# Allegro board my__AVRUSB500.brd
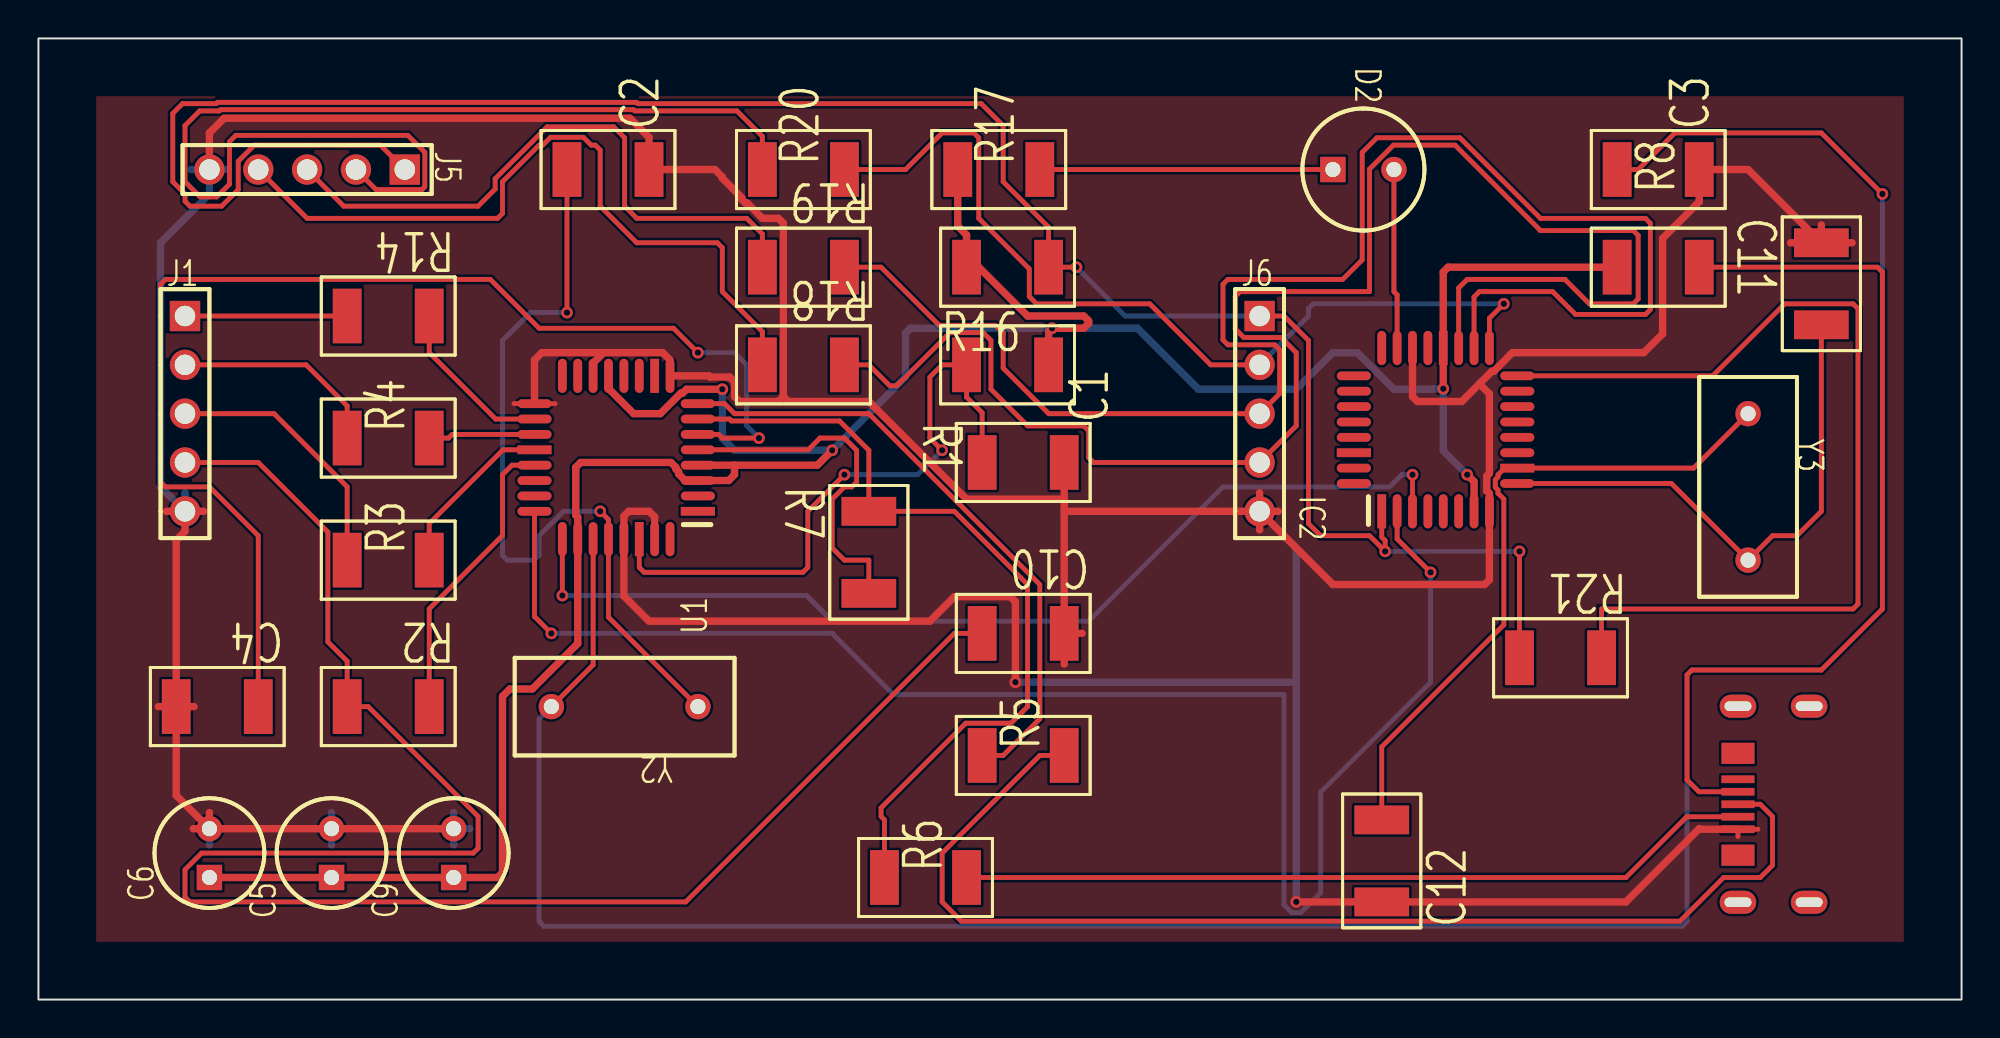
[diagram p0: board, top side]
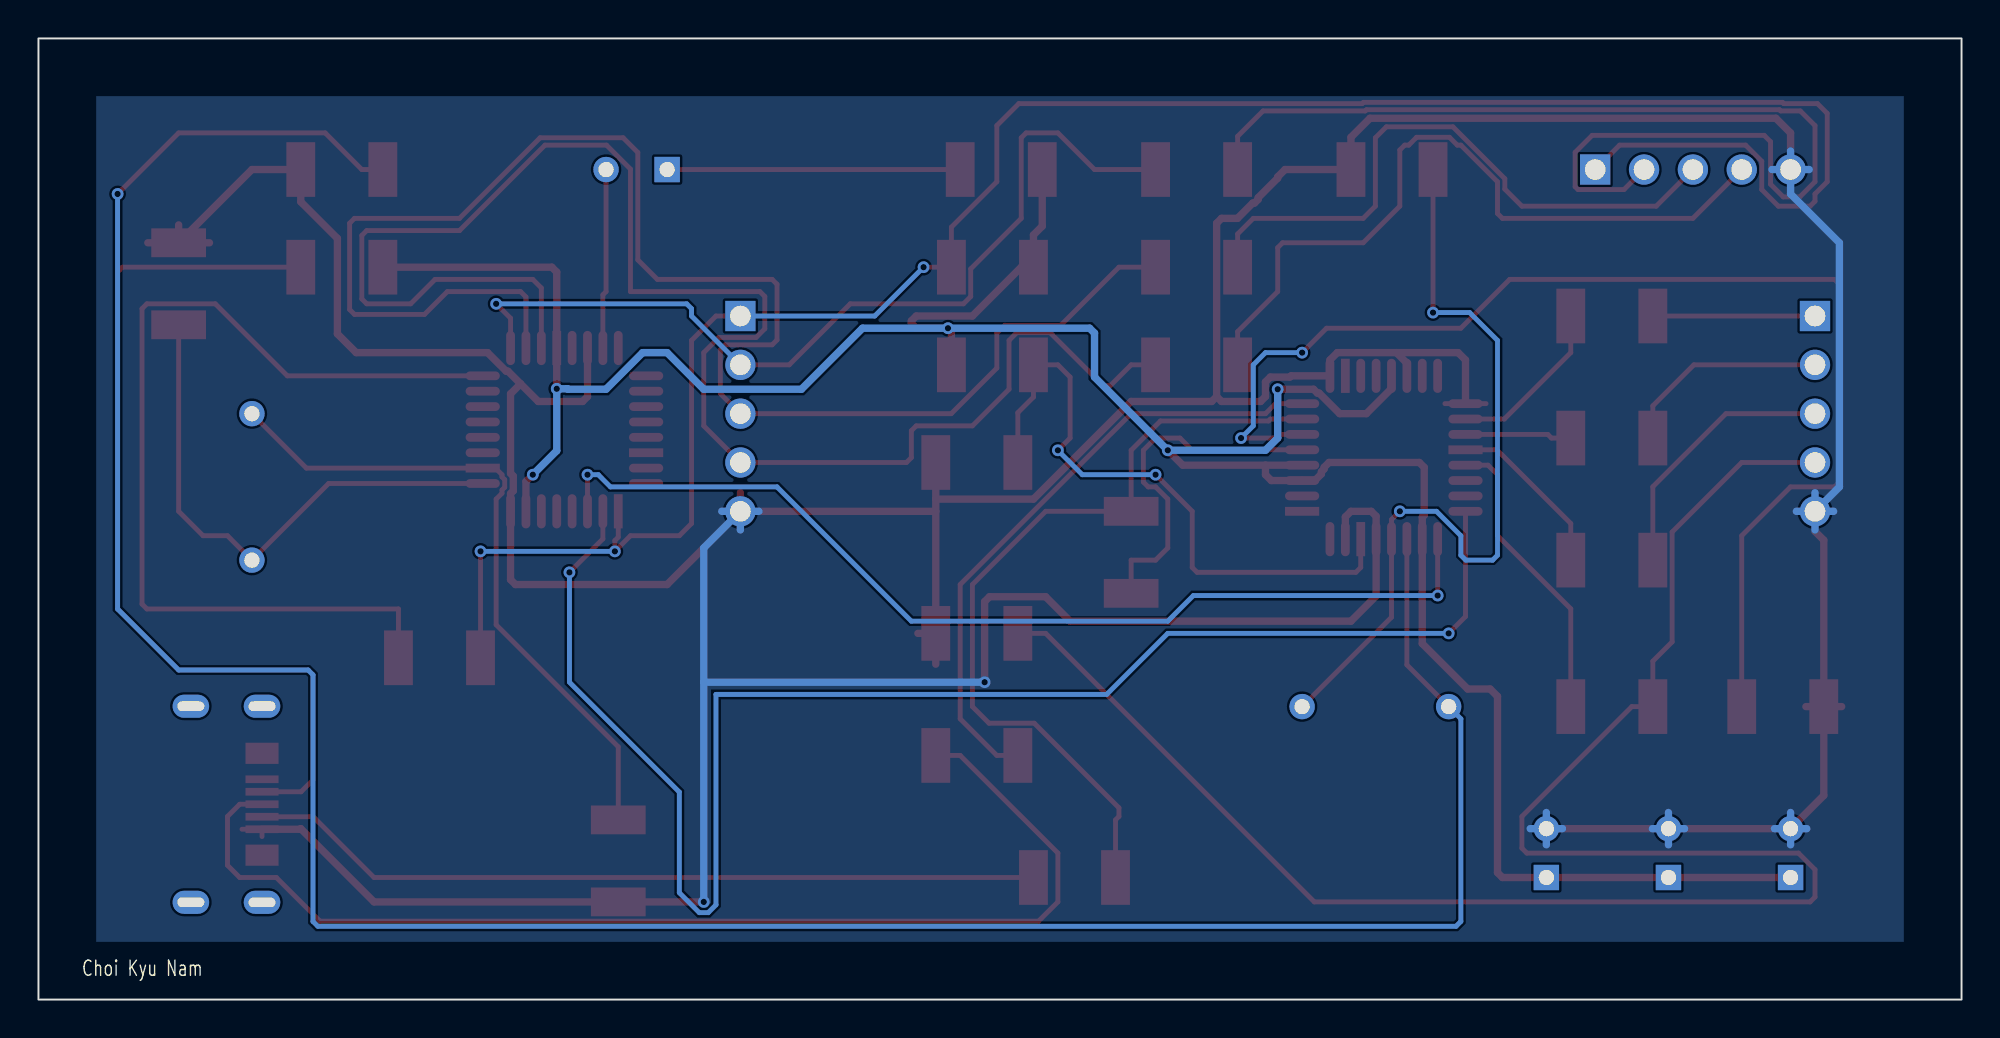
[diagram p1: board, bottom side, seen from below]

Outline 100 x 50 mm; copper layers: TOP, BOTTOM. Coordinates in mm from the lower left corner of the outline.
Outline path: rectangle 0,0 100,50

## Design rules (mm)
constraint set DEFAULT: min track width 0.254, pair gap 0.254
net group POWERNET: nets VCC

## Placement (name value [footprint] x y rotation side)
C1  47nF  [CPCYL1D225LS100031]  53.34 27.94 180 top
C2  27pF  [CPCYL1D225LS100031]  31.75 43.18 180 top
C3  27pF  [CPCYL1D225LS100031]  86.36 43.18 180 top
C4  47nF  [CPCYL1D225LS100031]  11.43 15.24 180 top
C5  100nF  [CPCYL1D225LS100031#2]  15.24 6.35 90 top
C6  1uF  [CPCYL1D225LS100031#2]  8.89 6.35 90 top
C9  100nF  [CPCYL1D225LS100031#2]  21.59 6.35 90 top
C10  22nF  [CPCYL1D225LS100031]  53.34 19.05 180 top
C11  100nF  [CPCYL1D225LS100031]  92.71 39.37 270 top
C12  100nF  [CPCYL1D225LS100031]  69.85 5.08 90 top
D2  LED  [CYLD250LS125031]  67.31 43.18 0 top
IC2  ATmega8  [QUAD80M32WG900]  69.85 25.4 0 top
J1  bbpg_Bitbang  [BLKCON100VHTM1SQSW1005]  7.62 35.56 270 top
J2  USBA  [MICRO_USB]  92.07 10.16 90 top
J5  avrusb500_out  [BLKCON100VHTM1SQSW1005]  19.05 43.18 180 top
J6  firmware_in  [BLKCON100VHTM1SQSW1005]  63.5 35.56 270 top
NOREF  -  []  100 0 90 top
NOREF#2  -  []  0 50 0 top
R1  470  [AX400X100031]  48.26 33.02 0 top
R2  220  [AX400X100031]  20.32 15.24 180 top
R3  220  [AX400X100031]  20.32 22.86 180 top
R4  220  [AX400X100031]  20.32 29.21 180 top
R5  27  [AX400X100031]  53.34 12.7 180 top
R6  27  [AX400X100031]  48.26 6.35 180 top
R7  1.5k  [AX400X100031]  43.18 25.4 270 top
R8  2.2  [AX400X100031]  86.36 38.1 180 top
R14  220  [AX400X100031]  20.32 35.56 180 top
R16  10k  [AX400X100031]  48.26 38.1 0 top
R17  470  [AX400X100031]  52.07 43.18 180 top
R18  1k  [AX400X100031]  41.91 33.02 180 top
R19  220  [AX400X100031]  41.91 38.1 180 top
R20  1k  [AX400X100031]  41.91 43.18 180 top
R21  220  [AX400X100031]  81.28 17.78 180 top
U1  FT232BM  [QUAD80M32WG900]  34.29 25.4 90 top
Y2  6Mhz  [RAD450X200LS300031]  34.29 15.24 180 top
Y3  3.6864Mhz  [RAD450X200LS300031]  88.9 30.48 270 top

## Library data of the parts
C1-C4 C10-C12 = CAPACITOR NON-POL: alternate symbols: (SML2015)
C5 C9 = CAPACITOR NON-POL: alternate symbols: (SMDCAP)
C6 = CAPACITOR POL: alternate symbols: (SMDCAP)
D2 = LED
IC2 = ATmega8-DIL28_1
J1 J5 J6 = CON5
J2 = CON4_7
R1-R8 R14 R16-R21 = R: alternate symbols: (SML2015)
U1 = FT232BM_2
Y2 Y3 = ZTA

## Footprints (pads in the part's own frame, mm; a bottom-side part is the same pattern mirrored in y, then rotated)
AX400X100031
  rect 1.499x2.845 smd: 1(0,0) 2(4.267,0)
BLKCON100VHTM1SQSW1005
  rect 1.575x1.575 hole 1.067: 1(0,0)
  round 1.575 hole 1.067: 2(2.54,0) 3(5.08,0) 4(7.62,0) 5(10.16,0)
CPCYL1D225LS100031
  rect 1.499x2.845 smd: 1(0,0) 2(4.267,0)
CPCYL1D225LS100031#2
  rect 1.321x1.321 hole 0.787: 1(0,0)
  round 1.321 hole 0.787: 2(2.54,0)
CYLD250LS125031
  rect 1.321x1.321 hole 0.787: 1(0,0)
  round 1.321 hole 0.787: 2(3.175,0)
MICRO_USB
  oval 1.2x1.9 hole 0.5x1.4: (-5.1,3.7) (-5.1,0) (5.1,3.7) (5.1,0)
  rect 1.1x1.72 smd: (-2.65,3.7) (2.65,3.7)
  rect 0.4x1.72 smd: 1(-1.3,3.7) 2(-0.65,3.7) 3(0,3.7) 4(0.65,3.7) 5(1.3,3.7)
QUAD80M32WG900
  rect 0.457x1.778 smd: 1(0,0) 20(3.2,8.496)
  oval 0.457x1.778 smd: 2(0.8,0) 3(1.6,0) 4(2.4,0) 5(3.2,0) 6(4,0) 7(4.801,0) 8(5.601,0) 17(5.601,8.496) 18(4.801,8.496) 19(4,8.496) 21(2.4,8.496) 22(1.6,8.496) 23(0.8,8.496) 24(0,8.496)
  oval 1.778x0.457 smd: 9(7.048,1.448) 11(7.048,3.048) 12(7.048,3.848) 13(7.048,4.648) 14(7.048,5.448) 15(7.048,6.248) 16(7.048,7.048) 25(-1.448,7.048) 26(-1.448,6.248) 27(-1.448,5.448) 28(-1.448,4.648) 29(-1.448,3.848) 31(-1.448,2.248) 32(-1.448,1.448)
  rect 1.778x0.457 smd: 10(7.048,2.248) 30(-1.448,3.048)
RAD450X200LS300031
  round 1.321 hole 0.787: 1(0,0) 2(7.62,0)

## Nets
+5V: J2.4 R8.1
GND: C1.1 C2.1 C3.1 C4.2 C5.2 C6.2 C9.2 C10.1 C11.1 C12.1 IC2.8 IC2.22 J1.5 J2.1 J5.5 J6.5 U1.9 U1.14 U1.17 U1.29 U1.31
VCC: C5.1 C6.1 C9.1 IC2.7(VCC) IC2.20 R1.2 R8.2 R16.1 R17.2 U1.3 U1.4 U1.13 U1.26
BMISO: J1.3 R3.2
BMOSI: J1.2 R4.2
BRESET: J1.1 R14.2
BSCK: C10.2 J1.4 R2.2
D+: J2.2 R6.1
D-: J2.3 R5.1
F_MISO: IC2.18 J6.3 R19.1
F_MOSI: IC2.17 J6.2 R20.1
F_SCK: IC2.19 J6.4 R18.1
MISO: J5.3 R19.2
MOSI: J5.2 R20.2
RESET: IC2.1 J5.1 J6.1 R16.2 R21.2
RXD: IC2.2 U1.24
SCK: J5.4 R18.2
TXD: IC2.3 U1.25
N02483: R6.2 R7.1 U1.7
N02615: R5.2 U1.8
N03527: C4.1 U1.6
N06839: R2.1 U1.21
N06967: R3.1 U1.20
N07033: R4.1 U1.19
N07247: R14.1 U1.18
N11951: R7.2 U1.5
N41098: C3.2 U1.27 Y2.2
N41106: C2.2 U1.28(XTOUT) Y2.1
N49165: C1.2 R1.1 U1.30
N98596: D2.2(CATHODE) IC2.23
N98600: D2.1 R17.1
N98612: C11.2 IC2.9 Y3.2
N98748: C12.2 IC2.10 Y3.1
N98890: IC2.16 R21.1

Pads without a net: IC2 4 5 6 11 12 13 14 15 21 24 25 26 27 28 29 30 31 32; J2 5; U1 1 2 10 11 12 15 16 22 23 32

## Via types
v1: diameter 0.61, hole 0.33, TOP to BOTTOM, 22 vias

## Routing (per net, layer and track width the routed paths; a pad name or vN(x,y) marks a point on that pad's centre or on a via; arc(x,y) is an arc through that point)
+5V: length 47.1
  TOP w0.254: J2.4 86.35,10.81 85.73,11.43 85.73,16.89 85.98,17.15 92.71,17.15 95.88,20.32 95.88,37.85 95.63,38.1 R8.1
GND: length 338.7
  TOP w0.254: 24.73,31 U1.17 26.86,31 ; 88.38,8.48 J2.1 89.42,8.86
  TOP w0.381: C11.1 92.71,40.3 ; C11.1 91.11,39.37 ; C11.1 94.31,39.37 ; J6.5 64.47,25.4 ; J6.5 63.5,26.37 ; J6.5 63.5,24.43 ; 8.09,15.24 C4.2 6.23,15.24 ; 8.59,25.4 J1.5 6.65,25.4 ; 54.27,19.05 C10.1 53.34,17.45 ; 8.05,8.89 C6.2 8.89,9.73
  TOP w0.382: 53.34,25.4 C10.1 ; 53.34,25.4 J6.5 67.31,21.59 75.2,21.59 75.45,21.84 IC2.8 75.45,26.32 75.31,26.46 75.31,27.23 75.45,27.37 75.45,31.51 74.93,32.03 ; 53.34,25.4 53.34,26.04 ; U1.31 32.04,25.11 31.75,25.4 30.7,25.4 30.44,25.15 U1.29 30.44,20.99 31.75,19.69 46.36,19.69 47.62,20.96 50.55,20.96 50.8,20.7 v1(50.8,16.51) ; 74.93,32.03 75.59,32.69 75.68,32.69 76.64,33.66 83.48,33.66 84.45,34.63 84.45,39.6 86.36,41.5 C3.1 88.9,43.18 C11.1 ; 74.93,32.03 74.01,31.12 71.7,31.12 71.45,31.37 IC2.22 ; v1(65.41,5.08) C12.1 82.55,5.08 86.36,8.89 86.39,8.86 J2.1 ; U1.17 25.79,33.27 26.18,33.66 29.39,33.66 ; 29.39,33.66 28.84,33.11 U1.14 ; 29.39,33.66 32.46,33.66 32.84,33.27 U1.9 34.86,32.45 34.93,32.39 35.94,32.39 36.19,32.13 36.19,31.37 36.45,31.12 38.48,31.12 38.74,31.37 ; 38.74,31.37 38.74,40.39 38.48,40.64 37.65,40.64 36.85,41.44 36.76,41.44 36.57,41.63 36.57,41.72 35.56,42.73 35.56,42.8 35.18,43.18 C2.1 31.75,44.86 30.76,45.85 9.65,45.85 8.89,45.08 J5.5 ; 38.74,31.37 38.99,31.12 43.18,31.12 48.26,26.04 53.34,26.04 ; J1.5 7.62,24.36 7.16,23.9 C4.2 7.16,10.62 C6.2 C5.2 C9.2 ; C1.1 53.34,26.04
  BOTTOM w0.381: 63.5,24.43 J6.5 ; J6.5 62.53,25.4 ; J6.5 64.47,25.4 ; 6.65,25.4 J1.5 ; J1.5 7.62,24.43 ; J1.5 7.62,26.37 ; J1.5 8.59,25.4 ; 7.92,43.18 J5.5 ; J5.5 9.86,43.18 ; J5.5 8.89,44.15 ; 14.4,8.89 C5.2 ; C5.2 16.08,8.89 ; C5.2 15.24,8.05 ; C5.2 15.24,9.73 ; C9.2 21.59,9.73 ; C9.2 22.43,8.89 ; C9.2 21.59,8.05 ; C9.2 20.75,8.89 ; C6.2 8.89,9.73 ; C6.2 9.73,8.89 ; C6.2 8.05,8.89 ; C6.2 8.89,8.05
  BOTTOM w0.382: J1.5 6.35,26.67 6.35,39.37 8.89,41.91 J5.5 ; 65.41,16.51 v1(50.8,16.51) ; 65.41,16.51 65.41,23.5 J6.5 ; 65.41,16.51 v1(65.41,5.08)
VCC: length 149.5
  TOP w0.382: IC2.7 74.65,26.95 v1(74.3,27.31) ; v1(41.28,28.58) 40.5,27.8 36.19,27.8 ; C6.1 C5.1 C9.1 23.88,6.35 24.13,6.6 24.13,15.77 24.51,16.16 25.68,16.16 28.04,18.52 U1.26 28.04,25.09 27.94,25.2 27.94,27.69 28.19,27.94 32.89,27.94 33.15,27.69 33.15,27.6 33.29,27.46 33.29,27.34 33.63,27 U1.3 35.89,27 36.19,27.31 36.19,27.8 ; 36.19,27.8 U1.4 ; R8.2 73.3,38.1 73.05,37.85 IC2.20 v1(73.05,31.78) ; U1.13 29.64,31.79 30.95,30.48 32.33,30.48 33.4,31.55 33.49,31.55 33.7,31.75 v1(35.56,31.75) ; R17.2 47.8,40.23 48.26,39.78 R16.1 48.89,38.1 51.44,35.56 54.36,35.56 54.61,35.31 54.61,35.18 54.36,34.93 v1(52.7,34.93) 52.53,34.75 R1.2
  BOTTOM w0.382: v1(74.3,27.31) 73.05,28.55 v1(73.05,31.78) 72.49,31.78 72.47,31.75 70.49,31.75 68.58,33.66 67.31,33.66 65.41,31.75 60.32,31.75 57.15,34.93 v1(52.7,34.93) 45.34,34.93 45.08,34.67 45.08,32.39 v1(41.28,28.58) 36.19,28.58 35.56,29.21 v1(35.56,31.75)
BMISO: length 13.8
  TOP w0.254: R3.2 16.05,26.68 12.25,30.48 J1.3
BMOSI: length 11
  TOP w0.254: J1.2 13.92,33.02 16.05,30.89 R4.2
BRESET: length 8.9
  TOP w0.254: J1.1 R14.2 16.51,35.56
BSCK: length 93.7
  TOP w0.254: J1.4 11.43,27.94 15.05,24.32 15.05,18.61 16.05,17.6 R2.2 17.14,15.24 22.86,9.53 22.86,7.87 22.61,7.62 8.48,7.62 7.62,6.76 7.62,5.33 7.87,5.08 33.66,5.08 47.62,19.05 C10.2
D+: length 41.4
  TOP w0.254: R6.1 82.55,6.35 85.73,9.53 85.74,9.51 J2.2
D-: length 60.4
  TOP w0.254: R5.1 52.07,12.7 46.99,7.62 46.99,5.08 47.99,4.08 85.36,4.08 87.63,6.35 89.54,6.35 90.17,6.99 90.17,9.53 89.54,10.16 J2.3
F_MISO: length 83.1
  TOP w0.254: R19.1 43.81,38.1 46.84,35.08 49.76,35.08 50.17,34.67 50.17,32.85 52.54,30.48 J6.3 64.54,31.52 64.54,33.81 64.29,34.06 61.85,34.06 61.6,34.32 61.6,37.21 61.85,37.47 67.82,37.47 68.83,38.48 68.83,44.07 69.6,44.83 73.91,44.83 78.11,40.64 83.57,40.64 83.82,40.39 83.82,35.9 83.57,35.64 79.93,35.64 78.74,36.83 74.93,36.83 74.65,36.55 IC2.18
F_MOSI: length 47.5
  TOP w0.254: v1(76.2,36.2) 75.45,35.45 IC2.17 ; J6.2 60.96,33.02 57.79,36.2 51.9,36.2 51.52,36.57 51.52,38.01 48.89,40.64 48.89,44.83 48.64,45.09 46.99,45.09 45.08,43.18 R20.1
  BOTTOM w0.254: v1(76.2,36.2) 66.29,36.2 66.04,35.94 66.04,35.56 J6.2
F_SCK: length 86.6
  TOP w0.254: IC2.19 73.85,37.02 74.3,37.47 79.38,37.47 80.64,36.2 82.93,36.2 83.19,36.45 83.19,39.75 82.93,40.01 78.11,40.01 73.66,44.45 70.46,44.45 69.22,43.2 69.22,36.83 62.48,36.83 62.23,36.58 62.23,34.9 62.68,34.44 64.62,34.44 65.41,33.66 65.41,29.84 J6.4 54.86,27.94 54.61,28.19 54.61,29.59 54.36,29.84 51.44,29.84 49.53,31.75 49.53,34.29 49.12,34.7 47.4,34.7 44.63,31.93 44.27,31.93 43.18,33.02 R18.1
MISO: length 32.6
  TOP w0.254: J5.3 15.88,41.28 22.86,41.28 23.75,42.16 23.75,42.7 26.45,45.4 29.91,45.4 30.48,44.83 30.48,41.28 31.12,40.64 36.83,40.64 37.64,39.83 R19.2
MOSI: length 57.2
  TOP w0.254: J5.2 17.55,42.14 19.94,42.14 20.09,42.29 20.09,44.07 19.21,44.96 10.26,44.96 9.93,44.63 9.93,42.42 9.27,41.76 8.41,41.76 7.62,42.55 7.62,45.47 8.38,46.23 9.41,46.23 9.47,46.29 30.94,46.29 31.01,46.23 36.32,46.23 37.64,44.91 R20.2
RESET: length 115.2
  TOP w0.254: J6.1 64.77,35.56 66.04,34.29 66.04,24.77 66.68,24.13 69.22,24.13 v1(70.03,23.32) 70.03,23.88 69.85,24.06 IC2.1 ; J5.1 17.78,44.45 11.23,44.45 10.39,43.61 10.39,42.14 9.53,41.28 7.87,41.28 7.62,41.53 7.62,41.91 6.99,42.55 6.99,46.1 7.49,46.61 9.25,46.61 9.31,46.67 31.1,46.67 31.17,46.61 49.02,46.61 50.17,45.47 50.17,42.55 52.53,40.18 R16.2 v1(53.98,38.1) ; R21.2 v1(77.01,23.32)
  BOTTOM w0.254: v1(77.01,23.32) v1(70.03,23.32) ; J6.1 56.51,35.56 v1(53.98,38.1)
RXD: length 82.5
  TOP w0.254: IC2.2 70.65,23.97 v1(72.39,22.23) ; U1.24 25.79,19.93 v1(26.67,19.05)
  BOTTOM w0.254: v1(26.67,19.05) 41.28,19.05 44.45,15.88 64.77,15.88 64.77,4.92 65.17,4.52 65.64,4.52 66.68,5.56 66.68,10.8 72.39,16.51 v1(72.39,22.23)
SCK: length 38.9
  TOP w0.254: J5.4 13.97,40.64 23.88,40.64 24.13,40.89 24.13,42.55 26.04,44.45 26.22,44.45 26.63,44.86 28.34,44.86 28.75,44.45 28.96,44.45 29.21,44.2 29.21,41.28 31.12,39.37 35.31,39.37 35.56,39.12 35.56,36.83 37.64,34.75 R18.2
TXD: length 52.8
  TOP w0.254: IC2.3 v1(71.45,27.31) ; U1.25 v1(27.24,21.02)
  BOTTOM w0.254: v1(27.24,21.02) 39.94,21.02 41.28,19.69 54.61,19.69 61.6,26.67 70.25,26.67 70.89,27.31 v1(71.45,27.31)
N02483: length 42.4
  TOP w0.254: U1.7 35.94,30.2 36.04,30.1 41.66,30.1 43.18,28.58 R7.1 47.62,25.4 51.44,21.59 51.44,15.24 50.57,14.38 48.22,14.38 43.81,9.97 43.81,9.53 43.99,9.35 R6.2
N02615: length 32.4
  TOP w0.254: U1.8 35.67,31 36.19,30.48 43.18,30.48 52.07,21.59 52.07,14.61 50.17,12.7 R5.2
N03527: length 65.2
  TOP w0.254: C4.1 11.43,24.13 8.89,26.67 6.6,26.67 6.35,26.92 6.35,37.21 6.6,37.47 23.5,37.47 26.04,34.93 33.02,34.93 v1(34.29,33.66) ; U1.6 35.37,29.4 35.56,29.21 v1(37.47,29.21)
  BOTTOM w0.254: v1(34.29,33.66) 36.19,33.66 36.83,33.02 36.83,29.84 v1(37.47,29.21)
N06839: length 15.5
  TOP w0.254: U1.21 24.62,27.8 24.13,27.31 24.13,24.14 20.32,20.33 R2.1
N06967: length 9
  TOP w0.254: U1.20 24.16,28.6 20.32,24.77 R3.1
N07033: length 5.6
  TOP w0.254: U1.19 21.51,29.4 21.32,29.21 R4.1
N07247: length 8.8
  TOP w0.254: R14.1 20.32,33.66 23.77,30.2 U1.18
N11951: length 18.5
  TOP w0.254: U1.5 40.03,28.6 40.64,29.21 41.91,29.21 42.55,28.58 42.55,26.92 42.29,26.67 41.91,26.67 41.28,26.04 41.28,23.5 41.91,22.86 43.18,22.86 R7.2
N41098: length 142.8
  TOP w0.254: U1.27 28.84,17.41 Y2.2 ; C3.2 83.19,43.18 85.09,45.09 92.71,45.09 v1(95.88,41.91)
  BOTTOM w0.254: Y2.2 26.04,14.61 26.04,4.06 26.29,3.81 85.47,3.81 85.73,4.06 85.73,16.89 85.98,17.15 92.71,17.15 95.88,20.32 v1(95.88,41.91)
N41106: length 41.7
  TOP w0.254: Y2.1 29.64,19.89 U1.28 29.64,24.97 v1(29.21,25.4) ; C2.2 v1(27.48,35.74)
  BOTTOM w0.254: v1(29.21,25.4) 27.31,25.4 26.04,24.13 26.04,23.11 25.78,22.86 24.38,22.86 24.13,23.11 24.13,34.29 25.58,35.74 v1(27.48,35.74)
N49165: length 33.3
  TOP w0.254: v1(41.91,27.31) 40,25.4 40,22.48 39.75,22.23 31.5,22.23 31.24,22.48 U1.30 ; v1(46.99,28.58) 46.36,29.21 46.36,32.39 46.99,33.02 R1.1 48.26,31.34 49.07,30.53 C1.2
  BOTTOM w0.254: v1(41.91,27.31) 45.72,27.31 v1(46.99,28.58)
N98596: length 9.4
  TOP w0.254: IC2.23 70.65,36.67 70.49,36.83 D2.2
N98600: length 15.2
  TOP w0.254: R17.1 D2.1
N98612: length 28.2
  TOP w0.254: C11.2 92.71,25.4 91.44,24.13 90.17,24.13 Y3.2 84.91,26.85 IC2.9
N98748: length 35.2
  TOP w0.254: Y3.1 86.07,27.65 IC2.10 76.24,27.65 75.9,27.31 75.9,27.19 75.75,27.05 75.75,26.65 75.9,26.51 75.9,26.34 76.2,26.04 76.2,19.5 69.85,13.15 C12.2
N98890: length 50.7
  TOP w0.254: IC2.16 87.06,32.45 90.81,36.2 94.36,36.2 94.62,35.94 94.62,20.57 94.36,20.32 81.28,20.32 R21.1

## Copper pours and planes (outline as drawn; the poured copper is in the pictures)
GND on TOP: 3,3 3,47 97,47 97,3 ; 28 cut-outs
GND on BOTTOM: 3,3 3,47 97,47 97,3

## Text on the board
Ref Des/Silkscreen Bottom: Choi Kyu Nam
DIMENSION: FIGURE | FINISHED_SIZE | 0.33 | 0.787 | 1.067 | 1.4x0.5 | DRILL CHART: TOP to BOTTOM | ALL UNITS ARE IN MILLIMETERS | PLATED | QTY | 22 | 12 | 15 | 4
